# EAGLE board CT_schematic (EAGLE 7.6.0)

Size 100 x 80 mm. Coordinates in mm from the lower left corner, seen from the top.
Outline: 0,0 100,0 100,80 0,80 0,0
Copper layers (1*16): Top 0.035mm / dielectric 1.5mm / Bottom 0.035mm
Design rules "default": minimum track width 10mil, minimum drill 24mil, track to track 8mil, track to pad 8mil, pad to pad 8mil, via to via 8mil, smd to smd 8mil, copper to edge 40mil, drill to drill 8mil, minimum pad ring 10mil, minimum via ring 8mil, stop-mask expansion 4mil, vias tented up to drill 0mil, thermal gap 10mil

## Footprints (pad centres in the part's own frame; a part is rotated, then mirrored left to right if it is on the bottom)
C0603 = smd 0.8 x 0.8: 1 -0.762,0; 2 0.762,0
C0402 = smd 0.5 x 0.5: 1 -0.508,0; 2 0.508,0
R0603 = smd 0.8 x 0.8: 1 -0.762,0; 2 0.762,0
C0805 = smd 1.2 x 1.3: 1 -1.016,0; 2 1.016,0
C1210 = smd 1.2 x 2.5: 1 -1.524,0; 2 1.524,0
EXV-9H = smd 3.505 x 1.676: 1 -2.857,0; 2 2.857,0
L0603 = smd 0.8 x 0.8: 1 -0.762,0; 2 0.762,0
PJ-037B_PACKAGE = drill 3.7 square: 1 12,0 | drill 3.2 square: 2 6,0
LQFP144 = smd 0.35 x 1.35: 1 -8.75,-10.625; 2 -8.25,-10.625; 3 -7.75,-10.625; 4 -7.25,-10.625; 5 -6.75,-10.625; 6 -6.25,-10.625; 7 -5.75,-10.625; 8 -5.25,-10.625; 9 -4.75,-10.625; 10 -4.25,-10.625; 11 -3.75,-10.625; 12 -3.25,-10.625; 13 -2.75,-10.62; 14 -2.25,-10.625; 15 -1.75,-10.625; 16 -1.25,-10.625; 17 -0.75,-10.625; 18 -0.25,-10.625; 19 0.25,-10.625; 20 0.75,-10.625; 21 1.25,-10.625; 22 1.75,-10.625; 23 2.25,-10.625; 24 2.75,-10.62; 25 3.25,-10.625; 26 3.75,-10.625; 27 4.25,-10.625; 28 4.75,-10.625; 29 5.25,-10.625; 30 5.75,-10.625; 31 6.25,-10.625; 32 6.75,-10.625; 33 7.25,-10.625; 34 7.75,-10.625; 35 8.25,-10.625; 36 8.75,-10.625; 73 8.75,10.625; 74 8.25,10.625; 75 7.75,10.625; 76 7.25,10.625; 77 6.75,10.625; 78 6.25,10.625; 79 5.75,10.625; 80 5.25,10.625; 81 4.75,10.625; 82 4.25,10.625; 83 3.75,10.625; 84 3.25,10.625; 85 2.75,10.625; 86 2.25,10.625; 87 1.75,10.625; 88 1.25,10.625; 89 0.75,10.625; 90 0.25,10.625; 91 -0.25,10.625; 92 -0.75,10.625; 93 -1.25,10.625; 94 -1.75,10.625; 95 -2.25,10.625; 96 -2.75,10.625; 97 -3.25,10.625; 98 -3.75,10.625; 99 -4.25,10.625; 100 -4.75,10.625; 101 -5.25,10.625; 102 -5.75,10.625; 103 -6.25,10.625; 104 -6.75,10.625; 105 -7.25,10.625; 106 -7.75,10.625; 107 -8.25,10.625; 108 -8.75,10.625 | smd 1.35 x 0.35: 37 10.625,-8.75; 38 10.625,-8.25; 39 10.625,-7.75; 40 10.625,-7.25; 41 10.625,-6.75; 42 10.625,-6.25; 43 10.625,-5.75; 44 10.625,-5.25; 45 10.625,-4.75; 46 10.625,-4.25; 47 10.625,-3.75; 48 10.625,-3.25; 49 10.625,-2.75; 50 10.625,-2.25; 51 10.625,-1.75; 52 10.625,-1.25; 53 10.625,-0.75; 54 10.625,-0.25; 55 10.625,0.25; 56 10.625,0.75; 57 10.625,1.25; 58 10.625,1.75; 59 10.625,2.25; 60 10.625,2.75; 61 10.625,3.25; 62 10.625,3.75; 63 10.625,4.25; 64 10.625,4.75; 65 10.625,5.25; 66 10.625,5.75; 67 10.625,6.25; 68 10.625,6.75; 69 10.625,7.25; 70 10.625,7.75; 71 10.625,8.25; 72 10.625,8.75; 109 -10.625,8.75; 110 -10.625,8.25; 111 -10.625,7.75; 112 -10.625,7.25; 113 -10.625,6.75; 114 -10.625,6.25; 115 -10.625,5.75; 116 -10.625,5.25; 117 -10.625,4.75; 118 -10.625,4.25; 119 -10.625,3.75; 120 -10.625,3.25; 121 -10.625,2.75; 122 -10.625,2.25; 123 -10.625,1.75; 124 -10.625,1.25; 125 -10.625,0.75; 126 -10.625,0.25; 127 -10.625,-0.25; 128 -10.625,-0.75; 129 -10.625,-1.25; 130 -10.625,-1.75; 131 -10.625,-2.25; 132 -10.625,-2.75; 133 -10.625,-3.25; 134 -10.625,-3.75; 135 -10.625,-4.25; 136 -10.625,-4.75; 137 -10.625,-5.25; 138 -10.625,-5.75; 139 -10.625,-6.25; 140 -10.625,-6.75; 141 -10.625,-7.25; 142 -10.625,-7.75; 143 -10.625,-8.25; 144 -10.625,-8.75
AT24C02D = smd 1.6 x 0.6: 1 -2.475,1.905 | smd 1.55 x 0.6: 2 -2.475,0.635; 3 -2.475,-0.635; 4 -2.475,-1.905; 5 2.475,-1.905; 6 2.475,-0.635; 7 2.475,0.635; 8 2.475,1.905
TDFN-8/6MM = smd 0.3 x 0.75: 1 0,0; 2 0.5,0; 3 1,0; 4 1.5,0; 5 1.5,3; 6 1,3; 7 0.5,3; 8 0,3
PC28F512P33BFD = smd 0.45 x 0.45: A1 0,0; A2 1,0; A3 2,0; A4 3,0; A5 4,0; A6 5,0; A7 6,0; A8 7,0; B1 0,-1; B2 1,-1; B3 2,-1; B4 3,-1; B5 4,-1; B6 5,-1; B7 6,-1; B8 7,-1; C1 0,-2; C2 1,-2; C3 2,-2; C4 3,-2; C5 4,-2; C6 5,-2; C7 6,-2; C8 7,-2; D1 0,-3; D2 1,-3; D3 2,-3; D4 3,-3; D5 4,-3; D6 5,-3; D7 6,-3; D8 7,-3; E1 0,-4; E2 1,-4; E3 2,-4; E4 3,-4; E5 4,-4; E6 5,-4; E7 6,-4; E8 7,-4; F1 0,-5; F2 1,-5; F3 2,-5; F4 3,-5; F5 4,-5; F6 5,-5; F7 6,-5; F8 7,-5; G1 0,-6; G2 1,-6; G3 2,-6; G4 3,-6; G5 4,-6; G6 5,-6; G7 6,-6; G8 7,-6; H1 0,-7; H2 1,-7; H3 2,-7; H4 3,-7; H5 4,-7; H6 5,-7; H7 6,-7; H8 7,-7
RFM75-S = smd 0.85 x 1.6: 1 1.7,0.8; 2 2.97,0.8; 3 4.24,0.8; 4 5.51,0.8; 5 6.78,0.8; 6 8.05,0.8; 7 9.32,0.8; 8 10.59,0.8
QFN-24 = smd 0.7 x 0.305: 1 -1.815,1.25; 2 -1.815,0.75; 3 -1.815,0.25; 4 -1.815,-0.25; 5 -1.815,-0.73; 6 -1.815,-1.25; 13 1.815,-1.25; 14 1.815,-0.75; 15 1.815,-0.25; 16 1.815,0.25; 17 1.815,0.75; 18 1.815,1.25 | smd 0.305 x 0.7: 7 -1.25,-1.815; 8 -0.75,-1.815; 9 -0.25,-1.815; 10 0.25,-1.815; 11 0.75,-1.815; 12 1.25,-1.815; 19 1.25,1.815; 20 0.75,1.815; 21 0.25,1.815; 22 -0.25,1.815; 23 -0.75,1.815; 24 -1.25,1.815 | smd 2.591 x 2.591: 25 0,0
FCI_10118193-0001LF = smd 0.4 x 1.35: 1 -1.3,2.675; 2 -0.65,2.675; 3 0,2.675; 4 0.65,2.675; 5 1.3,2.675 | smd 1.6 x 1.4: 6 -3.2,2.45; 7 3.2,2.45 | smd 1.9 x 1.9: 8 -1.2,0; 9 1.2,0 | hole 0.5: -3.3,0; 3.3,0
SOT143B = smd 1 x 0.7: 1 -0.75,-1 | smd 0.6 x 0.7: 2 0.95,-1; 3 0.95,1; 4 -0.95,1
ABS07-32.768KHZ-7-T = smd 1.1 x 2.4: 1 -2.5,0; 2 0,0
ASFL1 = smd 1.7 x 1.5: 1 -1.27,-1.1; 2 1.27,-1.1; 3 1.27,1.1; 4 -1.27,1.1
WSON-8 = smd 0.3 x 0.6: 1 -0.75,0; 2 0.05,0; 3 0.85,0; 4 1.65,0; 5 1.65,3.8; 6 0.85,3.8; 7 0.05,3.8; 8 -0.75,3.8 | smd 3 x 2.6: PAD 0.45,1.9
SON-6 = smd 0.55 x 0.3: 1 -0.355,0.5 | smd 0.52 x 0.3: 2 -0.37,0; 3 -0.37,-0.5; 4 0.37,-0.5; 5 0.37,0; 6 0.37,0.5
SW_4-1437565-2 = smd 1.4 x 2.1: 1 -2.23,4.55; 2 -2.23,-4.55; 3 2.23,4.55; 4 2.23,-4.55
LGM67K-G1J2-24-Z = smd 0.8 x 1.4: A -2,0; C 0,0
NC7SZ125M5X = smd 1.3 x 0.7: 1 -1.3,0.95; 2 -1.3,0; 3 -1.3,-0.95; 4 1.3,-0.95; 5 1.3,0.95

## Placement (x,y rotation side)
C1  1e-06  [C0603]  -74.93,71.12 0 top  (outside the outline)
C2  1e-07  [C0603]  -78.74,71.12 0 top  (outside the outline)
C3  1e-07  [C0603]  -15.24,76.2 0 top  (outside the outline)
C4  1e-07  [C0603]  -19.05,76.2 0 top  (outside the outline)
C5  1e-07  [C0603]  -22.86,76.2 0 top  (outside the outline)
C6  1e-07  [C0603]  -26.67,76.2 0 top  (outside the outline)
C7  1e-07  [C0603]  -30.48,76.2 0 top  (outside the outline)
C8  1e-07  [C0603]  -34.29,76.2 0 top  (outside the outline)
C9  1e-07  [C0603]  -38.1,76.2 0 top  (outside the outline)
C10  1e-07  [C0603]  -41.91,76.2 0 top  (outside the outline)
C11  1e-07  [C0603]  -45.72,76.2 0 top  (outside the outline)
C12  1e-07  [C0603]  -49.53,76.2 0 top  (outside the outline)
C13  1e-07  [C0603]  -53.34,76.2 0 top  (outside the outline)
C14  4.7e-06  [C0603]  -59.69,71.12 0 top  (outside the outline)
C15  2.2e-06  [C0603]  -63.5,71.12 0 top  (outside the outline)
C16  2.2e-06  [C0603]  -67.31,71.12 0 top  (outside the outline)
C17  1e-08  [C0603]  -57.15,76.2 0 top  (outside the outline)
C18  1e-06  [C0603]  -60.96,76.2 0 top  (outside the outline)
C19  1e-11  [C0402]  -57.15,81.28 0 top  (outside the outline)
C20  1e-11  [C0402]  -60.96,81.28 0 top  (outside the outline)
C21  1e-08  [C0402]  -64.77,81.28 0 top  (outside the outline)
C22  1e-08  [C0402]  -68.58,81.28 0 top  (outside the outline)
C23  1e-07  [C0402]  -72.39,81.28 0 top  (outside the outline)
C24  1e-08  [C0402]  -76.2,81.28 0 top  (outside the outline)
C25  1e-07  [C0402]  -80.01,81.28 0 top  (outside the outline)
C26  1e-08  [C0402]  -15.24,86.36 0 top  (outside the outline)
C27  1e-07  [C0402]  -19.05,86.36 0 top  (outside the outline)
C28  1e-08  [C0402]  -22.86,86.36 0 top  (outside the outline)
C29  1e-07  [C0402]  -26.67,86.36 0 top  (outside the outline)
C30  1e-06  [C0603]  -64.77,76.2 0 top  (outside the outline)
C31  1e-08  [C0402]  -30.48,86.36 0 top  (outside the outline)
C32  2.2e-06  [C0603]  -71.12,71.12 0 top  (outside the outline)
C33  1e-08  [C0402]  -34.29,86.36 0 top  (outside the outline)
C34  1e-08  [C0402]  -38.1,86.36 0 top  (outside the outline)
C35  1e-06  [C0603]  -68.58,76.2 0 top  (outside the outline)
C36  1e-08  [C0402]  -41.91,86.36 0 top  (outside the outline)
C37  1e-08  [C0402]  -45.72,86.36 0 top  (outside the outline)
C38  8e-07  [R0603]  -72.39,76.2 0 top  (outside the outline)
C39  1e-05  [C0805]  -21.59,64.77 0 top  (outside the outline)
C40  1e-08  [C0402]  -49.53,86.36 0 top  (outside the outline)
C41  1e-05  [C1210]  -55.88,57.15 0 top  (outside the outline)
C42  1e-05  [C1210]  -62.23,57.15 0 top  (outside the outline)
C43  1e-07  [C0402]  -53.34,86.36 0 top  (outside the outline)
C44  0.0001  [EXV-9H]  -45.72,49.53 0 top  (outside the outline)
C45  0.0001  [EXV-9H]  -57.15,49.53 0 top  (outside the outline)
C46  1e-08  [C0402]  -57.15,86.36 0 top  (outside the outline)
C47  1e-08  [C0402]  -60.96,86.36 0 top  (outside the outline)
C48  1e-08  [C0402]  -64.77,86.36 0 top  (outside the outline)
F1  240.0  [L0603]  -76.2,76.2 0 top  (outside the outline)
J1  PJ-037B  [PJ-037B_PACKAGE]  -66.04,7.62 0 top  (outside the outline)
R2  1000.0  [R0603]  -80.01,76.2 0 top  (outside the outline)
R4  4700.0  [R0603]  -15.24,81.28 0 top  (outside the outline)
R5  4700.0  [R0603]  -19.05,81.28 0 top  (outside the outline)
R6  4700.0  [R0603]  -22.86,81.28 0 top  (outside the outline)
R7  2200.0  [R0603]  -26.67,81.28 0 top  (outside the outline)
R8  2200.0  [R0603]  -30.48,81.28 0 top  (outside the outline)
R9  2200.0  [R0603]  -34.29,81.28 0 top  (outside the outline)
R10  2200.0  [R0603]  -38.1,81.28 0 top  (outside the outline)
R11  10000.0  [R0603]  -52.07,64.77 0 top  (outside the outline)
R12  10000.0  [R0603]  -57.15,64.77 0 top  (outside the outline)
R13  10000.0  [R0603]  -62.23,64.77 0 top  (outside the outline)
R14  10000.0  [R0603]  -67.31,64.77 0 top  (outside the outline)
R15  10000.0  [R0603]  -72.39,64.77 0 top  (outside the outline)
R16  10000.0  [R0603]  -77.47,64.77 0 top  (outside the outline)
R17  10000.0  [R0603]  -15.24,71.12 0 top  (outside the outline)
R18  10000.0  [R0603]  -20.32,71.12 0 top  (outside the outline)
R19  10000.0  [R0603]  -25.4,71.12 0 top  (outside the outline)
R20  10000.0  [R0603]  -30.48,71.12 0 top  (outside the outline)
R21  10000.0  [R0603]  -35.56,71.12 0 top  (outside the outline)
R22  10000.0  [R0603]  -40.64,71.12 0 top  (outside the outline)
R23  8060.0  [R0603]  -41.91,81.28 0 top  (outside the outline)
R24  100000.0  [R0603]  -26.67,64.77 0 top  (outside the outline)
R25  36000.0  [R0603]  -45.72,71.12 0 top  (outside the outline)
R26  100000.0  [R0603]  -31.75,64.77 0 top  (outside the outline)
R27  100000.0  [R0603]  -36.83,64.77 0 top  (outside the outline)
R28  2231.0  [R0603]  -45.72,81.28 0 top  (outside the outline)
R29  1000.0  [R0603]  -49.53,81.28 0 top  (outside the outline)
R30  10000.0  [R0603]  -50.8,71.12 0 top  (outside the outline)
R31  10000.0  [R0603]  -55.88,71.12 0 top  (outside the outline)
R32  9100.0  [R0603]  -53.34,81.28 0 top  (outside the outline)
R33  680000.0  [R0603]  -41.91,64.77 0 top  (outside the outline)
R34  120000.0  [R0603]  -46.99,64.77 0 top  (outside the outline)
U1  STM32F205ZGT6  [LQFP144]  -24.13,11.43 0 top  (outside the outline)
U2  AT24C02D-SSHM-T  [AT24C02D]  -74.93,27.94 0 top  (outside the outline)
U3  24AA00T-I/MNY  [TDFN-8/6MM]  -59.69,27.94 0 top  (outside the outline)
U4  PC28F512P33BFD  [PC28F512P33BFD]  -27.94,33.02 0 top  (outside the outline)
U5  RFM75-S  [RFM75-S]  -49.53,3.81 0 top  (outside the outline)
U6  USB3317C-CP-TR  [QFN-24]  -48.26,57.15 0 top  (outside the outline)
U7  10118193-0001LF  [FCI_10118193-0001LF]  -35.56,48.26 0 top  (outside the outline)
U8  prtr5v0u2ax  [SOT143B]  -77.47,86.36 0 top  (outside the outline)
U9  ABS07-32.768KHZ-7-T  [ABS07-32.768KHZ-7-T]  -27.94,58.42 0 top  (outside the outline)
U10  ASFL1-25MHZ-NCS  [ASFL1]  -64.77,40.64 0 top  (outside the outline)
U11  ASFL1-26MHZ-NCS  [ASFL1]  -26.67,49.53 0 top  (outside the outline)
U12  LP2951ACSDX/NOPB  [WSON-8]  -48.26,38.1 0 top  (outside the outline)
U13  LP3878SDX-ADJ/NOPB  [WSON-8]  -30.48,38.1 0 top  (outside the outline)
U14  TPS3895ADRYR  [SON-6]  -13.97,90.17 0 top  (outside the outline)
U15  4-1437565-2  [SW_4-1437565-2]  -44.45,29.21 0 top  (outside the outline)
U16  Q65110A2395  [LGM67K-G1J2-24-Z]  -36.83,57.15 0 top  (outside the outline)
U17  nc7sz125m5x  [NC7SZ125M5X]  -67.31,55.88 0 top  (outside the outline)
U18  nc7sz125m5x  [NC7SZ125M5X]  -73.66,55.88 0 top  (outside the outline)
U19  nc7sz125m5x  [NC7SZ125M5X]  -15.24,64.77 0 top  (outside the outline)

## Library data of the parts
C1-C48 F1 J1 R2 R4-R34 U1-U19 = circuit_tree

## Nets
CLK_CRYSTAL_U1_8: C19.1 U1.8 U9.1
CLK_CRYSTAL_U1_9: C20.1 U1.9 U9.2
CLK_U1_23: U1.23 U10.3
CLK_U6_23: U6.23 U11.3
GND: C1.2 C2.2 C3.2 C4.2 C5.2 C6.2 C7.2 C8.2 C9.2 C10.2 C11.2 C12.2 C13.2 C14.2 C15.2 C16.2 C17.2 C18.2 C19.2 C20.2 C21.2 C22.2 C23.2 C24.2 C25.2 C26.2 C27.2 C28.2 C29.2 C30.2 C31.2 C32.2 C33.2 C34.2 C35.2 C36.2 C37.2 C38.2 C39.2 C40.2 C41.2 C42.2 C43.2 C44.2 C45.2 C46.2 C47.2 C48.2 J1.2 R2.2 R11.2 R12.2 R14.2 R15.2 R23.2 R26.2 R29.2 R32.2 R34.2 U1.16 U1.31 U1.38 U1.51 U1.61 U1.83 U1.94 U1.107 U1.120 U1.130 U2.4 U3.4 U4.B2 U4.H2 U4.H4 U4.H6 U5.1 U6.25 U7.5 U7.6 U7.7 U7.8 U7.9 U8.1 U10.2 U11.2 U12.3 U12.4 U12.PAD U13.3 U13.PAD U14.2 U16.C U17.1 U17.3 U18.1 U18.3 U19.1 U19.3
NET_U1_25: R5.1 U1.25 U18.4
NET_U1_33: C17.1 C18.1 F1.1 U1.32 U1.33
NET_U1_71: C15.1 U1.71
NET_U1_99: R10.1 U1.99 U2.5
NET_U1_100: R9.1 U1.100 U2.6
NET_U1_106: C16.1 U1.106
NET_U1_136: R7.1 U1.136 U3.6
NET_U1_138: R11.1 U1.138
NET_U1_140: R8.1 U1.140 U3.5
NET_U1_141: U16.A
NET_U1_142: U15.3 U15.4
NET_U2_1: R13.1 U2.1
NET_U2_2: R14.1 U2.2
NET_U2_3: R15.1 U2.3
NET_U2_7: R12.1 U2.7
NET_U4_A4: C27.1 C28.1 U4.A4
NET_U4_C6: R19.1 U4.C6
NET_U4_D4: R4.1 U4.D4 U17.4
NET_U5_3: R21.1 U5.3
NET_U6_4: C32.1 U6.4
NET_U6_22: R6.1 U6.22 U19.4
NET_U6_24: R23.1 U6.24
NET_U7_1: C35.1 U6.2 U7.1 U8.4
NET_U7_2: U6.5 U7.2 U8.3
NET_U7_3: U6.6 U7.3 U8.2
NET_U12_5: R24.1 U12.5
NET_U12_7: R25.2 R26.1 U12.7
NET_U13_1: C40.1 U13.1
NET_U13_6: R28.2 R29.1 U13.6
NET_U13_8: R27.1 U13.8
NET_U14_1: R31.1 R32.1 U14.1
NET_U14_3: R33.2 R34.1 U14.3
NET_U14_4: R30.1 U14.4 U17.2 U18.2 U19.2
NET_U15_1: R2.1 U15.1 U15.2
PROC_FSMC_A0: U1.10 U4.A1
PROC_FSMC_A1: U1.11 U4.B1
PROC_FSMC_A2: U1.12 U4.C1
PROC_FSMC_A3: U1.13 U4.D1
PROC_FSMC_A4: U1.14 U4.D2
PROC_FSMC_A5: U1.15 U4.A2
PROC_FSMC_A6: U1.50 U4.C2
PROC_FSMC_A7: U1.53 U4.A3
PROC_FSMC_A8: U1.54 U4.B3
PROC_FSMC_A9: U1.55 U4.C3
PROC_FSMC_A10: U1.56 U4.D3
PROC_FSMC_A11: U1.57 U4.C4
PROC_FSMC_A12: U1.87 U4.A5
PROC_FSMC_A13: U1.88 U4.B5
PROC_FSMC_A14: U1.89 U4.C5
PROC_FSMC_A15: U1.90 U4.D7
PROC_FSMC_A16: U1.80 U4.D8
PROC_FSMC_A17: U1.81 U4.A7
PROC_FSMC_A18: U1.82 U4.B7
PROC_FSMC_A19: U1.2 U4.C7
PROC_FSMC_A20: U1.3 U4.C8
PROC_FSMC_A21: U1.4 U4.A8
PROC_FSMC_A22: U1.5 U4.G1
PROC_FSMC_A23: U1.1 U4.H8
PROC_FSMC_A24: U1.128 U4.B6
PROC_FSMC_CLK: U1.117 U4.E6
PROC_FSMC_D0: U1.85 U4.F2
PROC_FSMC_D1: U1.86 U4.E2
PROC_FSMC_D2: U1.114 U4.G3
PROC_FSMC_D3: U1.115 U4.E4
PROC_FSMC_D4: U1.58 U4.E5
PROC_FSMC_D5: U1.59 U4.G5
PROC_FSMC_D6: U1.60 U4.G6
PROC_FSMC_D7: U1.63 U4.H7
PROC_FSMC_D8: U1.64 U4.E1
PROC_FSMC_D9: U1.65 U4.E3
PROC_FSMC_D10: U1.66 U4.F3
PROC_FSMC_D11: U1.67 U4.F4
PROC_FSMC_D12: U1.68 U4.F5
PROC_FSMC_D13: U1.77 U4.H5
PROC_FSMC_D14: U1.78 U4.G7
PROC_FSMC_D15: U1.79 U4.E7
PROC_FSMC_NE1: R17.1 U1.123 U4.B4
PROC_FSMC_NL: R16.1 U1.137 U4.F6
PROC_FSMC_NOE: R18.1 U1.118 U4.F8
PROC_FSMC_NWAIT: U1.122 U4.F7
PROC_FSMC_NWE: R20.1 U1.119 U4.G8
PROC_SPI1_MISO: U1.42 U5.7
PROC_SPI1_MOSI: U1.43 U5.6
PROC_SPI1_NSS: R22.1 U1.40 U5.4
PROC_SPI1_SCK: U1.133 U5.5
PROC_USB_OTG_HS_ULPI_CK: U1.41 U6.12
PROC_USB_OTG_HS_ULPI_D0: U1.37 U6.16
PROC_USB_OTG_HS_ULPI_D1: U1.46 U6.15
PROC_USB_OTG_HS_ULPI_D2: U1.47 U6.14
PROC_USB_OTG_HS_ULPI_D3: U1.69 U6.13
PROC_USB_OTG_HS_ULPI_D4: U1.70 U6.11
PROC_USB_OTG_HS_ULPI_D5: U1.73 U6.10
PROC_USB_OTG_HS_ULPI_D6: U1.74 U6.9
PROC_USB_OTG_HS_ULPI_D7: U1.135 U6.8
PROC_USB_OTG_HS_ULPI_DIR: U1.28 U6.19
PROC_USB_OTG_HS_ULPI_NXT: U1.29 U6.18
PROC_USB_OTG_HS_ULPI_STP: U1.26 U6.20
VCC_S1_11V4: C38.1 C41.1 C44.1 C45.1 J1.1 R27.2 U12.8 U13.4
VCC_TIER1_1V8: C34.1 C39.1 C46.1 C47.1 C48.1 R24.2 R25.1 U6.21 U12.1 U17.5 U18.5 U19.5
VCC_TIER1_3V3: C1.1 C2.1 C3.1 C4.1 C5.1 C6.1 C7.1 C8.1 C9.1 C10.1 C11.1 C12.1 C13.1 C14.1 C21.1 C22.1 C23.1 C24.1 C25.1 C26.1 C29.1 C30.1 C31.1 C33.1 C36.1 C37.1 C42.1 C43.1 F1.2 R4.2 R5.2 R6.2 R7.2 R8.2 R9.2 R10.2 R13.2 R16.2 R17.2 R18.2 R19.2 R20.2 R21.2 R22.2 R28.1 R30.2 R31.2 R33.1 U1.6 U1.17 U1.30 U1.39 U1.52 U1.62 U1.72 U1.84 U1.95 U1.108 U1.121 U1.131 U1.144 U2.8 U3.8 U4.A6 U4.D5 U4.D6 U4.G4 U4.H3 U5.2 U6.3 U6.17 U10.4 U11.4 U13.5 U14.6

## Tracks (layer width: path | path; a pad name or v marks a point on that pad's centre or on a via)
CLK_CRYSTAL_U1_8  (2 unrouted)
CLK_CRYSTAL_U1_9  (2 unrouted)
CLK_U1_23  (1 unrouted)
CLK_U6_23  (1 unrouted)
GND  (97 unrouted)
NET_U1_25  (2 unrouted)
NET_U1_33  (4 unrouted)
NET_U1_71  (1 unrouted)
NET_U1_99  (2 unrouted)
NET_U1_100  (2 unrouted)
NET_U1_106  (1 unrouted)
NET_U1_136  (2 unrouted)
NET_U1_138  (1 unrouted)
NET_U1_140  (2 unrouted)
NET_U1_142  (1 unrouted)
NET_U2_1  (1 unrouted)
NET_U2_2  (1 unrouted)
NET_U2_3  (1 unrouted)
NET_U2_7  (1 unrouted)
NET_U4_A4  (2 unrouted)
NET_U4_C6  (1 unrouted)
NET_U4_D4  (2 unrouted)
NET_U5_3  (1 unrouted)
NET_U6_4  (1 unrouted)
NET_U6_22  (2 unrouted)
NET_U6_24  (1 unrouted)
NET_U7_1  (3 unrouted)
NET_U7_2  (2 unrouted)
NET_U7_3  (2 unrouted)
NET_U12_5  (1 unrouted)
NET_U12_7  (2 unrouted)
NET_U13_1  (1 unrouted)
NET_U13_6  (2 unrouted)
NET_U13_8  (1 unrouted)
NET_U14_1  (2 unrouted)
NET_U14_3  (2 unrouted)
NET_U14_4  (4 unrouted)
NET_U15_1  (2 unrouted)
PROC_FSMC_A0  (1 unrouted)
PROC_FSMC_A1  (1 unrouted)
PROC_FSMC_A2  (1 unrouted)
PROC_FSMC_A3  (1 unrouted)
PROC_FSMC_A4  (1 unrouted)
PROC_FSMC_A5  (1 unrouted)
PROC_FSMC_A6  (1 unrouted)
PROC_FSMC_A7  (1 unrouted)
PROC_FSMC_A8  (1 unrouted)
PROC_FSMC_A9  (1 unrouted)
PROC_FSMC_A10  (1 unrouted)
PROC_FSMC_A11  (1 unrouted)
PROC_FSMC_A12  (1 unrouted)
PROC_FSMC_A13  (1 unrouted)
PROC_FSMC_A14  (1 unrouted)
PROC_FSMC_A15  (1 unrouted)
PROC_FSMC_A16  (1 unrouted)
PROC_FSMC_A17  (1 unrouted)
PROC_FSMC_A18  (1 unrouted)
PROC_FSMC_A19  (1 unrouted)
PROC_FSMC_A20  (1 unrouted)
PROC_FSMC_A21  (1 unrouted)
PROC_FSMC_A22  (1 unrouted)
PROC_FSMC_A23  (1 unrouted)
PROC_FSMC_A24  (1 unrouted)
PROC_FSMC_CLK  (1 unrouted)
PROC_FSMC_D0  (1 unrouted)
PROC_FSMC_D1  (1 unrouted)
PROC_FSMC_D2  (1 unrouted)
PROC_FSMC_D3  (1 unrouted)
PROC_FSMC_D4  (1 unrouted)
PROC_FSMC_D5  (1 unrouted)
PROC_FSMC_D6  (1 unrouted)
PROC_FSMC_D7  (1 unrouted)
PROC_FSMC_D8  (1 unrouted)
PROC_FSMC_D9  (1 unrouted)
PROC_FSMC_D10  (1 unrouted)
PROC_FSMC_D11  (1 unrouted)
PROC_FSMC_D12  (1 unrouted)
PROC_FSMC_D13  (1 unrouted)
PROC_FSMC_D14  (1 unrouted)
PROC_FSMC_D15  (1 unrouted)
PROC_FSMC_NE1  (2 unrouted)
PROC_FSMC_NL  (2 unrouted)
PROC_FSMC_NOE  (2 unrouted)
PROC_FSMC_NWAIT  (1 unrouted)
PROC_FSMC_NWE  (2 unrouted)
PROC_SPI1_MISO  (1 unrouted)
PROC_SPI1_MOSI  (1 unrouted)
PROC_SPI1_NSS  (2 unrouted)
PROC_SPI1_SCK  (1 unrouted)
PROC_USB_OTG_HS_ULPI_CK  (1 unrouted)
PROC_USB_OTG_HS_ULPI_D0  (1 unrouted)
PROC_USB_OTG_HS_ULPI_D1  (1 unrouted)
PROC_USB_OTG_HS_ULPI_D2  (1 unrouted)
PROC_USB_OTG_HS_ULPI_D3  (1 unrouted)
PROC_USB_OTG_HS_ULPI_D4  (1 unrouted)
PROC_USB_OTG_HS_ULPI_D5  (1 unrouted)
PROC_USB_OTG_HS_ULPI_D6  (1 unrouted)
PROC_USB_OTG_HS_ULPI_D7  (1 unrouted)
PROC_USB_OTG_HS_ULPI_DIR  (1 unrouted)
PROC_USB_OTG_HS_ULPI_NXT  (1 unrouted)
PROC_USB_OTG_HS_ULPI_STP  (1 unrouted)
VCC_S1_11V4  (7 unrouted)
VCC_TIER1_1V8  (11 unrouted)
VCC_TIER1_3V3  (74 unrouted)